# EAGLE board Kruispunt schema v3 (EAGLE 9.1.2)
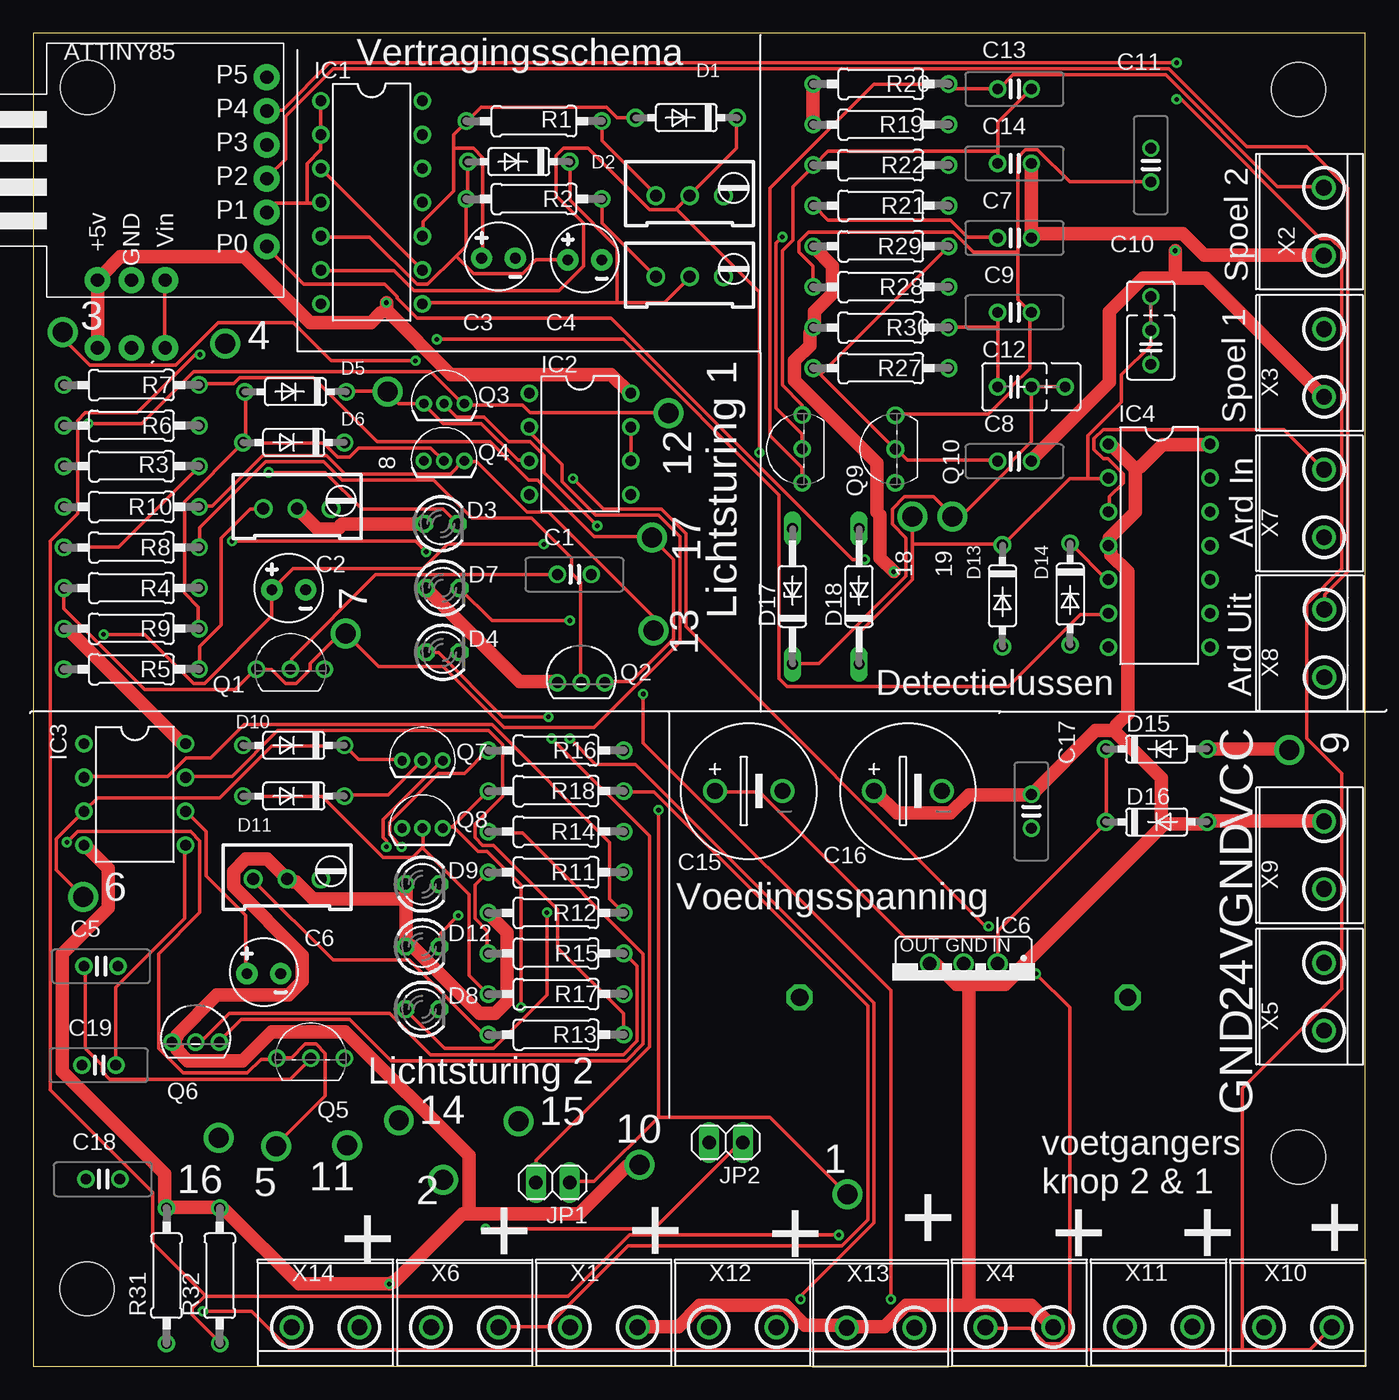
[diagram p0: board, top side]
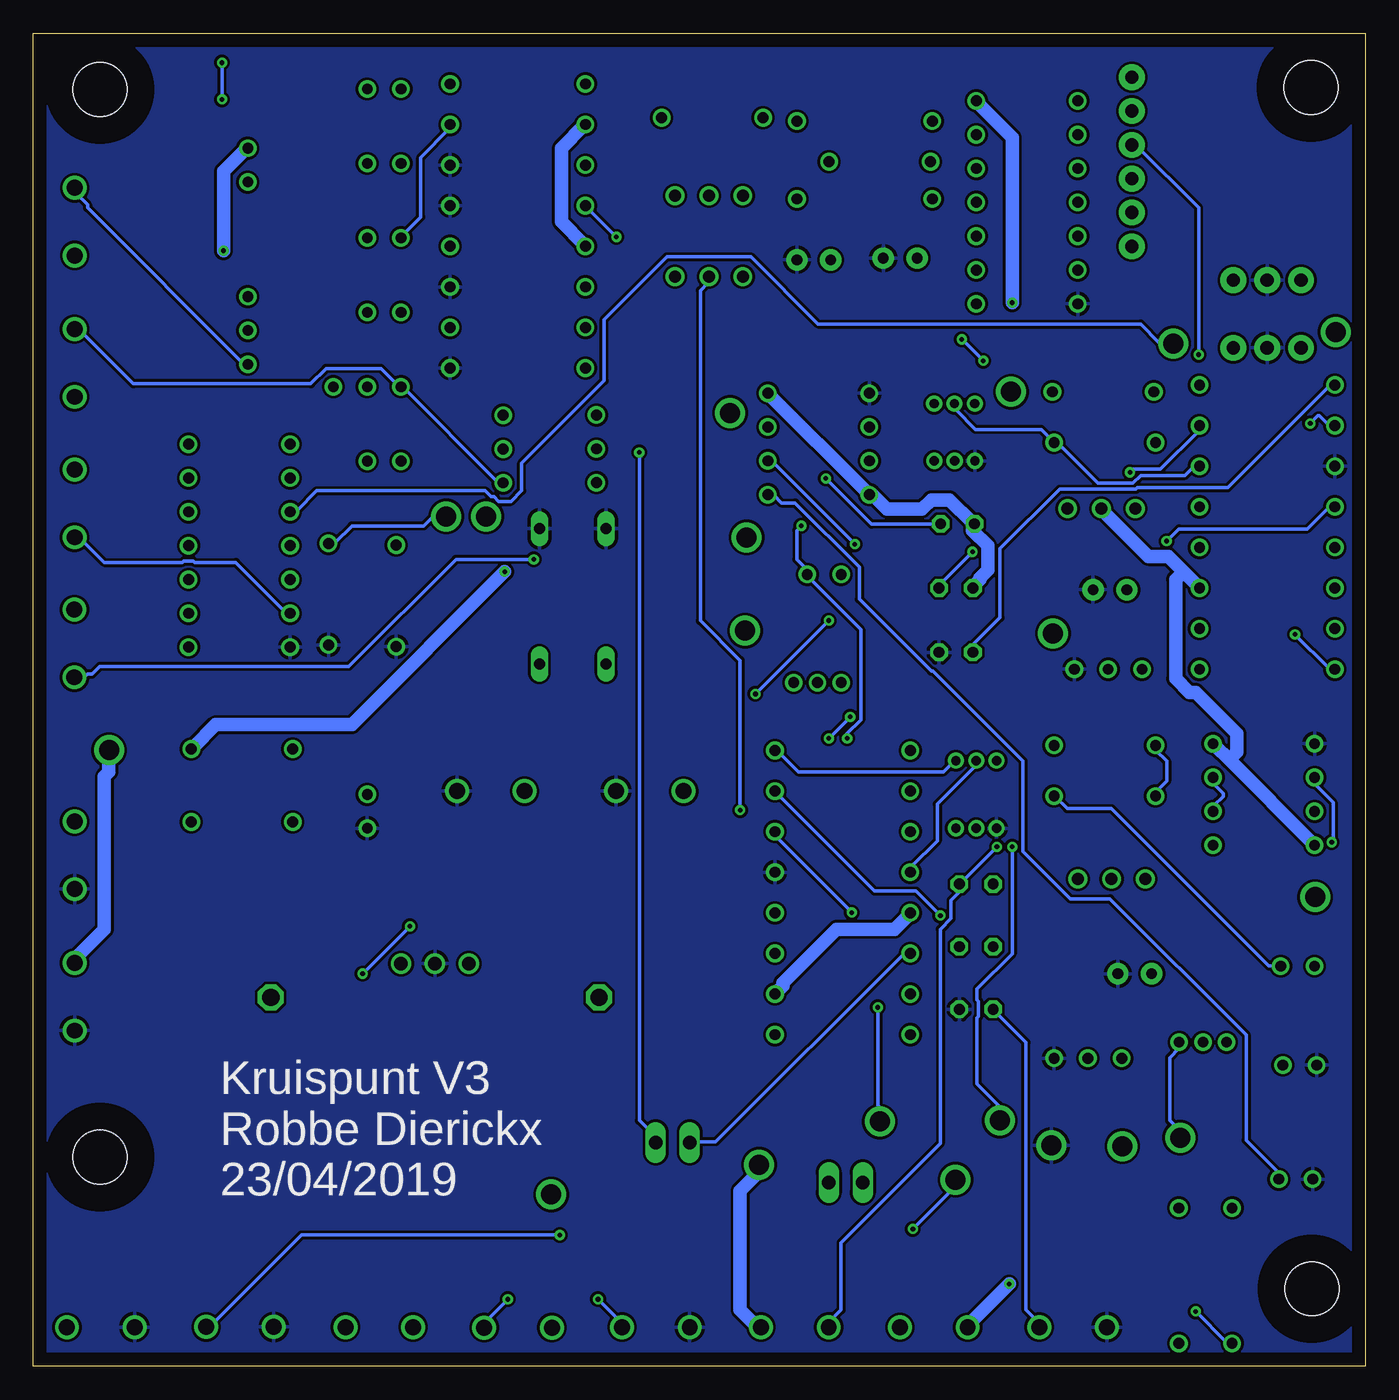
[diagram p1: board, bottom side, seen from below]

Size 100 x 100.07 mm. Coordinates in mm from the lower left corner, seen from the top.
Outline: 0,0 100,0 100,100.07 0,100.07 0,0
Copper layers (1*16): Top 0.035mm / dielectric 1.5mm / Bottom 0.035mm
Design rules "default *": minimum track width 10mil, minimum drill 0.35mm, track to track 8mil, track to pad 8mil, pad to pad 8mil, via to via 8mil, smd to smd 6mil, copper to edge 40mil, drill to drill 8mil, minimum pad ring 10mil, minimum via ring 8mil, stop-mask expansion 4mil, vias tented up to drill 0mil, thermal gap 10mil
Net classes: 0 default: clearance 0.205 mm; 1 VCC: width 1.016 mm, clearance 0.205 mm to class 0, clearance 0.205 mm

## Footprints (pad centres in the part's own frame; a part is rotated, then mirrored left to right if it is on the bottom)
PAD = drill 1.5: P$1 0,0
DIGISPARK = drill 1 pad 1.93: 5V 17.78,3.81; 5V1 22.86,3.81; GND 17.78,6.35; GND1 22.86,6.35; P0 15.24,16.51; P1 12.7,16.51; P2 10.16,16.51; P3 7.62,16.51; P4 5.08,16.51; P5 2.54,16.51; VIN 17.78,8.89; VIN1 22.86,8.89
CERAMIC-CAP-C050-025X075 = drill 0.8: P$1 -1.27,0; P$2 1.27,0
ELCO-2.5MMLEAD = drill 0.8 pad 1.6: + -1.27,0; - 1.27,0
CERAMIC-CAP-C025_050-035X075 = drill 0.8: P$1 -1.27,0; P$2 1.27,0; P$3 3.81,0
ELCO-5,0MMLEAD = drill 1.2: + -2.54,0; - 2.54,0
DO35-7 = drill 0.813: A 3.81,0; C -3.81,0
LED3MM = drill 0.813 octagon: A -1.27,0; K 1.27,0
DO35Z10 = drill 0.813 long: A 5.08,0; C -5.08,0
4,0 = hole 4.064: 0,0
DIL14 = drill 0.813: 1 -7.62,-3.81; 2 -5.08,-3.81; 3 -2.54,-3.81; 4 0,-3.81; 5 2.54,-3.81; 6 5.08,-3.81; 7 7.62,-3.81; 8 7.62,3.81; 9 5.08,3.81; 10 2.54,3.81; 11 0,3.81; 12 -2.54,3.81; 13 -5.08,3.81; 14 -7.62,3.81
DIL08 = drill 0.813: 1 -3.81,-3.81; 2 -1.27,-3.81; 3 1.27,-3.81; 4 3.81,-3.81; 5 3.81,3.81; 6 1.27,3.81; 7 -1.27,3.81; 8 -3.81,3.81
LM78XX-HEATSINK = drill 1.016: GND 0,-2.54; IN -2.54,-2.54; OUT 2.54,-2.54 | drill 1.3 octagon: P$1 -12.319,0; P$2 12.319,0
1X02 = drill 1.016 long: 1 -1.27,0; 2 1.27,0
TO92-CBE = drill 0.813: B 0,-1.27; C -2.54,-1.27; E 2.54,-1.27
TO92-EBC = drill 0.8: B 0,-0.127; C 1.778,-0.127; E -1.778,-0.127
TO-92 = drill 0.7: 1 -1.524,0; 2 0,0; 3 1.524,0
0207/10 = drill 0.813: 1 -5.08,0; 2 5.08,0
RTRIM64W = drill 0.9: 1 1.27,-2.54; 2 1.27,0; 3 1.27,2.54
W237-132 = drill 1.194: 1 -2.54,-0.635; 2 2.54,-0.635

## Placement (x,y rotation side)
1  Meetpin  [PAD]  61.12,12.89 0 top
2  Meetpin  [PAD]  30.76,14 0 top
3  Meetpin  [PAD]  2.22,77.64 0 top
4  Meetpin  [PAD]  14.41,76.78 0 top
5  Meetpin  [PAD]  18.24,16.52 0 top
6  Meetpin  [PAD]  3.76,35.22 0 top
7  Meetpin  [PAD]  23.44,55.01 0 top
8  Meetpin  [PAD]  26.61,73.16 0 top
9  Meetpin  [PAD]  94.31,46.25 0 top
10  Meetpin  [PAD]  45.51,15.12 0 top
11  Meetpin  [PAD]  23.57,16.56 0 top
12  [PAD]  47.69,71.56 0 top
13  [PAD]  46.56,55.22 0 top
14  Meetpin  [PAD]  27.44,18.45 0 top
15  Meetpin  [PAD]  36.44,18.37 0 top
16  Meetpin  [PAD]  13.91,17.15 0 top
17  Meetpin  [PAD]  46.44,62.21 0 top
18  [PAD]  66,63.8 270 top
19  [PAD]  69,63.8 270 top
ATTINY85  DIGISPARK  [DIGISPARK]  1.02,99.31 270 top
C1  100nF  [CERAMIC-CAP-C050-025X075]  40.62,59.44 0 top
C2  22µF  [ELCO-2.5MMLEAD]  19.18,58.29 0 top
C3  100µF  [ELCO-2.5MMLEAD]  34.92,83.19 0 top
C4  100µF  [ELCO-2.5MMLEAD]  41.4,83.06 0 top
C5  100nF  [CERAMIC-CAP-C050-025X075]  5.08,30.04 0 top
C6  22µF  [ELCO-2.5MMLEAD]  17.3,29.46 0 top
C7  10nF  [CERAMIC-CAP-C050-025X075]  73.66,84.71 0 top
C8  10nF  [CERAMIC-CAP-C050-025X075]  73.66,67.94 0 top
C9  10nF  [CERAMIC-CAP-C050-025X075]  73.66,79.12 0 top
C10  220nF  [CERAMIC-CAP-C025_050-035X075]  83.9,76.49 90 top
C11  10nF  [CERAMIC-CAP-C050-025X075]  83.9,90.17 90 top
C12  220nF  [CERAMIC-CAP-C025_050-035X075]  73.66,73.53 0 top
C13  10nF  [CERAMIC-CAP-C050-025X075]  73.66,95.88 0 top
C14  10nF  [CERAMIC-CAP-C050-025X075]  73.66,90.3 0 top
C15  470µF  [ELCO-5,0MMLEAD]  53.72,43.18 0 top
C16  470µF  [ELCO-5,0MMLEAD]  65.66,43.18 0 top
C17  100nF  [CERAMIC-CAP-C050-025X075]  74.93,41.66 90 top
C18  10nF  [CERAMIC-CAP-C050-025X075]  5.22,14.04 0 top
C19  10nF  [CERAMIC-CAP-C050-025X075]  4.92,22.6 0 top
D1  1N4148  [DO35-7]  49.02,93.73 180 top
D2  1N4148  [DO35-7]  36.45,90.42 180 top
D3  Rood  [LED3MM]  30.61,63.25 0 top
D4  Groen  [LED3MM]  30.73,53.59 0 top
D5  1N4148  [DO35-7]  19.68,73.15 180 top
D6  1N4148  [DO35-7]  19.56,69.34 180 top
D7  Geel  [LED3MM]  30.73,58.42 0 top
D8  Groen  [LED3MM]  29.21,26.8 0 top
D9  Rood  [LED3MM]  29.21,36.2 0 top
D10  1N4148  [DO35-7]  19.56,46.61 180 top
D11  1N4148  [DO35-7]  19.56,42.8 180 top
D12  Geel  [LED3MM]  29.21,31.5 0 top
D13  1N4148  [DO35-7]  72.76,57.83 270 top
D14  1N4148  [DO35-7]  77.84,57.96 270 top
D15  1N4004  [DO35-7]  84.33,46.34 0 top
D16  1N4004  [DO35-7]  84.33,40.86 0 top
D17  1N821  [DO35Z10]  57,57.8 90 top
D18  1N821  [DO35Z10]  62,57.8 90 top
HOLE1  MOUNT-HOLE-4MM  [4,0]  94.99,15.7 0 top
HOLE2  MOUNT-HOLE-4MM  [4,0]  94.99,95.85 0 top
HOLE3  MOUNT-HOLE-4MM  [4,0]  4.08,96 0 top
HOLE4  MOUNT-HOLE-4MM  [4,0]  4.02,5.81 0 top
IC1  74ACT132N  [DIL14]  25.4,87.38 270 top
IC2  LM555N  [DIL08]  41.04,69.24 270 top
IC3  LM555N  [DIL08]  7.62,42.93 270 top
IC4  74AC132N  [DIL14]  84.53,61.6 270 top
IC6  [LM78XX-HEATSINK]  69.85,27.69 180 top
JP1  [1X02]  39,13.8 180 top
JP2  [1X02]  52,16.8 180 top
Q1  BC548  [TO92-CBE]  19.3,53.59 0 top
Q2  2N3906  [TO92-EBC]  41.13,51.45 0 top
Q3  [TO-92]  30.84,72.26 0 top
Q4  [TO-92]  30.83,67.97 0 top
Q5  BC548  [TO92-CBE]  20.83,24.38 0 top
Q6  2N3906  [TO92-EBC]  12.19,24.45 0 top
Q7  [TO-92]  29.21,45.47 0 top
Q8  [TO-92]  29.21,40.39 0 top
Q9  BC548  [TO92-CBE]  56.45,68.87 90 top
Q10  BC548  [TO92-CBE]  63.45,68.85 90 top
R1  8k  [0207/10]  37.59,93.47 0 top
R2  8k  [0207/10]  37.59,87.63 0 top
R3  1k  [0207/10]  7.37,67.56 0 top
R4  10k  [0207/10]  7.37,58.42 0 top
R5  80k  [0207/10]  7.37,52.32 0 top
R6  1k  [0207/10]  7.37,70.61 0 top
R7  1k  [0207/10]  7.37,73.66 0 top
R8  10k  [0207/10]  7.37,61.47 0 top
R9  10k  [0207/10]  7.37,55.37 0 top
R10  220  [0207/10]  7.37,64.52 0 top
R11  1k  [0207/10]  39.24,37.08 0 top
R12  10k  [0207/10]  39.24,34.04 0 top
R13  80k  [0207/10]  39.24,24.89 0 top
R14  1k  [0207/10]  39.24,40.13 0 top
R15  10k  [0207/10]  39.24,30.99 0 top
R16  1k  [0207/10]  39.24,46.23 0 top
R17  10k  [0207/10]  39.24,27.94 0 top
R18  220  [0207/10]  39.24,43.18 0 top
R19  47k  [0207/10]  63.63,93.22 0 top
R20  2,2k  [0207/10]  63.63,96.27 0 top
R21  10k  [0207/10]  63.63,87.12 0 top
R22  470  [0207/10]  63.63,90.17 0 top
R23  5k  [RTRIM64W]  49.28,83.06 270 top
R24  5k  [RTRIM64W]  49.28,89.15 270 top
R25  50k  [RTRIM64W]  19.81,65.66 270 top
R26  50k  [RTRIM64W]  19.05,37.85 270 top
R27  10k  [0207/10]  63.63,74.93 0 top
R28  470  [0207/10]  63.63,81.03 0 top
R29  47k  [0207/10]  63.63,84.07 0 top
R30  2,2k  [0207/10]  63.63,77.98 0 top
R31  10k  [0207/10]  10,6.8 90 top
R32  10k  [0207/10]  14,6.8 90 top
X1  Rood2  [W237-132]  42.83,3.57 0 top
X2  [W237-132]  96.25,85.92 90 top
X3  [W237-132]  96.27,75.31 90 top
X4  Rood1  [W237-132]  74.03,3.57 0 top
X5  [W237-132]  96.27,27.73 90 top
X6  Geel2  [W237-132]  32.39,3.56 0 top
X7  [W237-132]  96.27,64.77 90 top
X8  [W237-132]  96.28,54.26 90 top
X9  [W237-132]  96.27,38.36 90 top
X10  Voetgagnersknop1  [W237-132]  94.94,3.56 0 top
X11  Voetgangersknop 2 en 1  [W237-132]  84.49,3.59 0 top
X12  Groen1  [W237-132]  53.26,3.57 0 top
X13  Geel1  [W237-132]  63.61,3.53 0 top
X14  Groen2  [W237-132]  21.94,3.56 0 top

## Library data of the parts
1-19 ATTINY85 C2-C4 C6 C10 C12 C15 C16 D1 D2 D5 D6 D10 D11 D13-D18 HOLE1-HOLE4 IC1-IC4 IC6 JP1 JP2 Q1-Q10 R1-R32 = Kruispunt Library
C1 C5 C7-C9 C11 C13 C14 C17-C19 = test(3)
D3 D4 D7-D9 D12 = Hardware lichtsturing library; MF: VISHAY SEMICONDUCTOR; OC_FARNELL: 1612439
X1-X14 = Kruispunt Library; OC_FARNELL: unknown; OC_NEWARK: unknown

## Nets
DIG-IN1: C1.P$2 D6.C JP1.2 Q3.2 R3.2 R8.1
DIG-IN2: C5.P$2 D11.C JP2.2 Q7.2 R11.1 R15.1
GND [VCC]: 11.P$1 ATTINY85.GND ATTINY85.GND1 C2.- C3.- C4.- C6.- C15.- C16.- C17.P$1 C18.P$1 C19.P$1 D4.K D8.K D13.A D14.A D17.A D18.A IC1.7 IC2.1 IC3.1 IC4.7 IC6.GND Q1.E Q4.1 Q5.E Q8.1 R3.1 R11.2 R21.2 R22.2 R27.2 R28.2 X5.1 X9.1 X10.1 X11.1 X12.1 X14.1
LUS-OUT1: C9.P$1 C12.P$1 Q10.C R30.2 X3.2
N48 [VCC]: C8.P$2 C11.P$2 X3.1
N49 [VCC]: C7.P$2 C14.P$2 X2.1
N$1: C4.+ D2.A IC1.5 R2.1
N$2: IC1.3 IC1.9
N$3: ATTINY85.P1 IC1.1 IC1.2 IC1.4
N$4: C1.P$1 Q1.B
N$5: R13.1 R26.1
N$6: 1.P$1 D2.C IC1.8 JP1.1 R23.2
N$7: C3.+ D1.A IC1.10 R1.1
N$8: 7.P$1 IC2.2 Q1.C R4.1
N$9: C2.+ IC2.6 IC2.7 R5.1
N$10: 17.P$1 Q2.C R7.2
N$11: D4.A R7.1 X12.2
N$12: Q2.B R8.2
N$13: 12.P$1 Q3.3 R6.1
N$14: D3.K R6.2 X4.1
N$15: 8.P$1 D5.C IC2.3 Q3.1
N$16: R2.2 R23.1
N$17: 13.P$1 Q4.3 R10.2
N$18: D7.K R10.1 X13.2
N$19: C5.P$1 Q5.B
N$20: 5.P$1 IC3.2 Q5.C R12.2
N$21: C6.+ IC3.6 IC3.7 R13.2
N$22: 16.P$1 Q6.C R14.1
N$23: D8.A R14.2 X14.2
N$24: Q6.B R15.2
N$25: 14.P$1 Q7.3 R16.2
N$26: ATTINY85.P3 R32.1 X11.2
N$27: 6.P$1 D10.C IC3.3 Q7.1
N$28: D10.A D11.A Q8.2 R17.1
N$29: 15.P$1 Q8.3 R18.1
N$30: D12.K R18.2 X6.2
N$31: C7.P$1 Q9.B R19.2 R21.1
N$32: C13.P$2 C14.P$1 Q9.E R22.1
N$33: C10.P$1 C13.P$1 Q9.C R20.2 X2.2
N$34: 18.P$1 C10.P$2 C10.P$3 D13.C D18.C IC4.2
N$35: 4.P$1 IC4.3 X7.2
N$36: R1.2 R24.1
N$37: R5.2 R25.1
N$38: C19.P$2 IC3.5
N$39: C8.P$1 Q10.B R27.1 R29.2
N$40: C9.P$2 C11.P$1 Q10.E R28.1
N$41: D5.A D6.A Q4.2 R9.2
N$42: 19.P$1 C12.P$2 C12.P$3 D14.C D17.C IC4.5
N$43: C18.P$2 IC2.5
N$44: 3.P$1 IC4.6 X7.1
N$45: C15.+ D15.C D16.C IC6.IN
N$47: 2.P$1 D1.C IC1.6 JP2.1 R24.2
N$48: ATTINY85.P2 X8.2
N$49: D9.K R16.1 X1.1
N$50: ATTINY85.P0 X8.1
N$51: ATTINY85.P4 R31.1 X10.2
VCC [VCC]: 10.P$1 ATTINY85.5V ATTINY85.5V1 C16.+ C17.P$2 D3.A D7.A D9.A D12.A D16.A IC1.14 IC2.4 IC2.8 IC3.4 IC3.8 IC4.1 IC4.4 IC4.14 IC6.OUT Q2.E Q6.E R4.2 R9.1 R12.1 R17.2 R25.2 R26.2 R31.2 R32.2 X1.2 X4.2 X6.1 X9.2 X13.1
VCC-LUS [VCC]: 9.P$1 D15.A R19.1 R20.1 R29.1 R30.1 X5.2
VIN: ATTINY85.VIN ATTINY85.VIN1

## Tracks (layer width: path | path; a pad name or v marks a point on that pad's centre or on a via)
DIG-IN1  (via drill 0.35)
  Top 0.254: R8.1 2.29,61.48 6.43,61.48 12.39,67.45 R3.2 | v42.34,63.09 38.33,67.11 38.33,68.37 37.29,69.4 35.69,69.4 33.85,71.24 31.79,71.24 30.87,72.16 Q3.2 | v38.9,47.14 46.24,39.8 46.24,23.96 37.75,15.47 37.75,13.86 JP1.2
  Bottom 0.254: Q3.2 30.75,72.16 30.75,71.81 29.26,70.32 24.33,70.32 23.41,69.4 D6.C 23.29,69.29 23.07,69.29 20.08,66.3 17.44,66.3 16.87,66.88 13.54,66.88 12.97,67.45 12.51,67.45 R3.2 | v42.34,63.09 42.69,62.74 42.69,60.56 42,59.88 42,59.53 C1.P$2 42,59.42 37.87,55.29 37.87,48.52 38.9,47.48 v38.9,47.14
DIG-IN2
  Top 0.254: R15.1 34.08,31.07 34.08,32.68 33.16,33.6 33.16,36.12 34.08,37.04 R11.1 | Q7.2 29.15,45.42 26.62,42.89 23.41,42.89 D11.C
  Bottom 0.254: JP2.2 50.72,16.84 48.77,16.84 34.65,30.96 34.2,30.96 R15.1 | C5.P$2 6.43,30.04 7.23,30.04 19.05,41.86 22.38,41.86 23.29,42.78 D11.C | R11.1 34.08,37.16 34.08,37.5 32.13,39.45 32.13,42.2 29.26,45.07 29.26,45.42 Q7.2
GND
  pour Bottom: 0,100.8 100,100.8 100,-0.2 0,-0.2
LUS-OUT1
  Top 0.254: 72.41,78.01 72.41,79.04 C9.P$1 | 72.41,78.01 72.41,73.65 C12.P$1 | 72.41,78.01 68.73,78.01 R30.2
  Bottom 0.254: Q10.C 64.83,66.42 65.18,66.42 72.29,73.53 C12.P$1 72.41,73.42 73.9,74.91 78.03,74.91 79.18,73.76 92.49,73.76 96.5,77.78 96.85,77.78 X3.2
N48  (via drill 0.35)
  Top 1.016: 85.72,81.68 88.01,81.68 96.85,72.84 X3.1 | 85.72,81.68 83.31,81.68 80.78,79.15 80.78,73.88 74.93,68.02 C8.P$2 | 85.72,81.68 v85.72,83.74
  Bottom 1.016: v85.72,83.74 85.72,89.71 84,91.43 C11.P$2
N49
  Top 1.016: C14.P$2 74.93,84.78 C7.P$2 75.39,85.01 86.29,85.01 87.9,83.4 96.85,83.4 X2.1
N$1
  Top 0.254: 31.73,83.34 32.47,84.09 32.47,87.53 R2.1 32.59,87.65 32.59,90.4 D2.A | 31.73,83.34 29.61,81.22 28.8,81.22 25.25,84.78 21.69,84.78 IC1.5 | 31.73,83.34 33.05,82.02 36.72,82.02 37.75,83.06 40.05,83.06 C4.+
N$2
  Top 0.254: IC1.3 21.69,89.83 29.15,82.37 IC1.9
N$3
  Top 0.254: IC1.1 21.57,94.99 21.57,92.47 IC1.2 21.57,92.35 21.57,91.32 20.54,90.28 20.54,87.3 | 20.54,87.3 18.13,87.3 17.56,86.73 ATTINY85.P1 | 20.54,87.3 21.57,87.3 IC1.4
N$4
  Top 0.254: C1.P$1 39.24,59.42 25.7,59.42 19.39,53.11 19.39,52.42 Q1.B
N$5
  Top 0.254: R13.1 34.08,24.99 33.74,24.99 28.23,30.5 22.49,30.5 16.52,36.47 R26.1
N$6  (via drill 0.35)
  Top 0.254: 46.93,18.68 42.11,13.86 40.28,13.86 JP1.1 | 46.93,18.68 55.31,18.68 61.05,12.94 1.P$1 | 43.83,79.84 47.39,79.84 49.23,81.68 R23.2 | 43.83,79.84 29.26,79.84 IC1.8 | 43.83,79.84 43.83,83.97 40.28,87.53 40.28,90.4 D2.C | v46.93,41.75 46.93,18.68
  Bottom 0.254: v46.93,41.75 46.93,52.99 49.92,55.98 49.92,80.76 49.34,81.34 49.34,81.68 R23.2
N$7
  Top 0.254: 31.56,91.43 31.56,92.47 32.47,93.38 R1.1 32.59,93.5 33.62,94.53 43.03,94.53 43.83,93.73 D1.A | 31.56,91.43 31.56,88.22 29.26,85.93 29.26,84.89 IC1.10 | 31.56,91.43 33.05,91.43 33.74,90.74 33.74,83.29 C3.+
N$8
  Top 0.254: R4.1 2.29,58.38 2.29,56.89 8.38,50.81 15.15,50.81 16.64,52.3 Q1.C 16.87,52.3 17.9,52.3 18.93,51.27 19.74,51.27 20.77,52.3 20.77,52.76 22.95,54.94 23.41,54.94 7.P$1 23.52,54.94 25.93,52.53 30.75,52.53 35.34,47.94 42.11,47.94 48.54,54.37 48.54,62.29 46.93,63.89 42.23,63.89 39.7,66.42 39.7,67.68 37.29,70.09 37.29,70.43 IC2.2
N$9  (via drill 0.35)
  Top 0.254: IC2.6 44.87,68.02 44.87,70.43 IC2.7 | v5.28,54.94 8.38,54.94 12.05,51.27 12.85,51.27 17.9,56.32 17.9,58.27 C2.+ 18.02,58.38 19.51,59.88 29.26,59.88 31.1,61.71 v38.33,61.71
  Bottom 0.254: v5.28,54.94 2.75,52.42 2.29,52.42 R5.1 | v38.33,61.71 44.52,67.91 44.75,67.91 IC2.6
N$10
  Top 0.254: Q2.C 42.92,51.38 44.87,51.38 48.08,54.6 48.08,60.56 46.47,62.17 17.P$1 46.36,62.29 42.11,62.29 37.87,66.53 37.18,66.53 34.31,69.4 25.82,69.4 21,74.22 15.49,74.22 15.03,73.76 12.51,73.76 R7.2
N$11  (via drill 0.35)
  Top 0.254: v57.6,5.03 57.6,5.26 63.11,10.76 63.11,27.29 45.21,45.19 42.23,45.19 v40.28,47.14 | v38.67,48.75 35.23,48.75 30.41,53.56 29.49,53.56 D4.A
  Bottom 0.254: R7.1 2.64,73.65 10.33,65.96 17.1,65.96 17.21,65.84 22.95,65.84 27.43,61.37 27.43,56.2 29.49,54.14 29.49,53.68 D4.A | v57.6,5.03 55.88,3.3 55.88,2.96 X12.2 | v38.67,48.75 v40.28,47.14
N$12
  Top 0.254: Q2.B 41.08,51.38 41.08,58.84 40.39,59.53 40.39,60.68 37.41,63.66 32.93,63.66 30.06,66.53 23.18,66.53 21.8,67.91 17.44,67.91 12.51,62.98 12.51,61.48 R8.2
N$13  (via drill 0.35)
  Top 0.254: 12.P$1 47.62,71.58 37.29,71.58 36.72,72.16 32.47,72.16 Q3.3 32.24,72.27 29.84,74.68 12.05,74.68 8.15,70.78 v4.13,70.78
  Bottom 0.254: v4.13,70.78 3.56,71.35 3.44,71.35 2.75,70.66 2.29,70.66 R6.1
N$14  (via drill 0.35)
  Top 0.254: v17.67,67.11 21.92,67.11 24.67,64.35 30.75,64.35 31.79,63.32 D3.K | v75.28,29.47 77.8,26.94 77.8,2.39 77.11,1.7 75.97,1.7 74.82,2.85 71.49,2.85 X4.1 | v71.72,33.02 71.49,33.02 49,55.52 49,62.52 47.16,64.35 42.8,64.35 v40.51,66.65
  Bottom 0.254: v17.67,67.11 17.44,67.34 15.38,67.34 12.51,70.2 12.51,70.55 R6.2 | v71.72,33.02 v75.28,29.47 | v40.51,66.65 37.06,63.2 31.9,63.2 D3.K
N$15
  Top 0.254: IC2.3 37.18,68.02 36.38,68.02 33.62,70.78 30.75,70.78 29.38,72.16 Q3.1 29.26,72.27 27.43,72.27 26.62,73.07 8.P$1 26.51,73.19 23.52,73.19 D5.C
N$16
  Top 0.254: R2.2 42.69,87.53 42.69,85.81 46.7,81.79 R23.1
N$17
  Top 0.254: 13.P$1 46.47,55.29 46.47,56.32 38.67,64.12 37.06,64.12 33.28,67.91 32.36,67.91 Q4.3 32.24,67.91 31.33,66.99 23.41,66.99 22.03,68.37 17.21,68.37 13.43,64.58 12.51,64.58 R10.2
N$18  (via drill 0.35)
  Top 0.254: v14.92,61.94 28.69,61.94 v29.49,61.14 | v64.38,5.03 64.38,28.2 45.78,46.8 v45.78,50.47 | v40.28,55.98 34.42,55.98 32.02,58.38 D7.K
  Bottom 0.254: v14.92,61.94 14,62.86 4.36,62.86 2.75,64.47 2.29,64.47 R10.1 | v29.49,61.14 31.9,58.73 31.9,58.5 D7.K | v64.38,5.03 66.1,3.3 66.1,2.96 X13.2 | v40.28,55.98 v45.78,50.47
N$19
  Top 0.254: C5.P$1 3.9,29.93 3.9,23.84 5.16,22.58 5.16,22.12 5.74,21.55 19.28,21.55 20.77,23.04 Q5.B
N$20  (via drill 0.35)
  Top 0.254: 5.P$1 18.25,16.62 21.92,20.29 21.92,23.5 21.23,24.19 20.43,24.19 19.39,23.16 18.36,23.16 Q5.C 18.25,23.04 17.1,23.04 16.07,22.01 11.24,22.01 9.41,23.84 9.41,30.96 12.51,34.06 12.51,39.45 11.82,40.14 3.33,40.14 v2.52,39.34 | IC3.2 3.9,44.27 10.1,44.27 11.47,45.65 13.31,45.65 15.84,48.17 34.42,48.17 43.26,39.34 43.26,35.09 44.29,34.06 R12.2
  Bottom 0.254: v2.52,39.34 2.41,39.45 2.41,42.32 3.79,43.7 3.79,44.16 IC3.2
N$21
  Top 0.254: R13.2 44.29,24.99 44.29,26.48 39.36,31.42 39.36,34.29 34.54,39.11 33.74,39.11 33.16,39.68 33.16,40.71 35.23,42.78 35.23,46.68 34.2,47.71 18.36,47.71 14.92,44.27 11.47,44.27 IC3.7 | C6.+ 15.95,29.47 15.95,33.83 12.97,36.81 12.97,40.14 11.47,41.63 IC3.6
  Bottom 0.254: IC3.6 11.36,41.75 11.36,42.09 10.67,42.78 10.67,43.01 11.36,43.7 11.36,44.16 IC3.7
N$22
  Top 0.254: R14.1 34.2,40.02 36.72,40.02 45.78,30.96 45.78,24.19 44.52,22.93 26.85,22.93 23.75,26.02 15.61,26.02 14,24.42 Q6.C
  Bottom 0.254: Q6.C 14,24.3 14,23.84 14.69,23.16 14.69,18.45 14,17.76 14,17.19 16.P$1
N$23  (via drill 0.35)
  Top 0.254: v38.56,34.06 38.56,27.86 34.54,23.84 30.87,23.84 28,26.71 D8.A
  Bottom 0.254: D8.A 27.88,26.71 25.47,24.3 25.47,4.22 24.56,3.3 24.56,2.96 X14.2 | v38.56,34.06 44.29,39.8 44.29,40.02 R14.2
N$24
  Top 0.254: Q6.B 12.28,24.42 12.62,24.42 14.69,26.48 26.74,26.48 29.84,23.39 44.29,23.39 45.33,24.42 45.33,30.04 44.41,30.96 R15.2
N$25  (via drill 0.35)
  Top 0.254: v26.51,38.99 26.51,39.45 26.28,39.68 26.28,41.06 30.64,45.42 Q7.3
  Bottom 0.254: Q7.3 30.75,45.42 30.98,45.19 31.1,45.19 31.67,44.61 42.57,44.61 44.29,46.34 R16.2 | v26.51,38.99 26.51,30.96 29.15,28.32 29.15,27.52 29.03,27.4 29.03,26.25 29.15,26.14 29.15,21.21 27.54,19.6 27.54,18.57 14.P$1
N$26  (via drill 0.35)
  Top 0.254: 12.85,5.26 11.93,4.34 11.93,3.88 14,1.81 R32.1 | 12.85,5.26 40.16,5.26 44.75,9.85 v60.47,9.85 | v12.51,75.94 12.16,75.94 7.8,71.58 3.9,71.58 3.33,71.01 3.33,64.01 1.26,61.94 1.26,20.75 8.95,13.06 8.95,9.27 12.85,5.37 12.85,5.26
  Bottom 0.254: v60.47,9.85 79.87,9.85 86.75,2.96 86.98,2.96 X11.2 | v12.51,75.94 12.51,86.96 17.21,91.66 17.44,91.66 ATTINY85.P3
N$27
  Top 0.254: Q7.1 27.66,45.53 24.44,45.53 23.41,46.57 D10.C 23.29,46.57 17.9,46.57 14,42.66 4.82,42.66 3.9,41.75 IC3.3 3.79,41.63 1.72,39.57 1.72,37.27 3.67,35.32 6.P$1
N$28
  Top 0.254: 29.26,38.88 29.26,40.37 Q8.2 | 29.26,38.88 32.7,35.44 32.7,29.35 34.08,27.98 R17.1 | D11.A 15.84,42.78 21.69,42.78 26.28,38.19 28.46,38.19 29.15,38.88 29.26,38.88
  Bottom 0.254: D11.A 15.72,42.89 15.72,43.12 14.92,43.93 14.92,45.42 15.72,46.22 15.72,46.57 D10.A
N$29  (via drill 0.35)
  Top 0.254: 31.44,40.48 30.75,40.48 Q8.3 | 31.44,40.48 34.08,43.12 R18.1 | v36.6,26.94 36.6,36.12 34.08,38.65 33.39,38.65 31.56,40.48 31.44,40.48
  Bottom 0.254: v36.6,26.94 36.6,19.6 36.49,19.48 36.49,18.45 15.P$1
N$30  (via drill 0.35)
  Top 0.254: v31.9,33.83 30.52,32.45 30.52,31.53 D12.K | X6.2 35,2.96 38.56,2.96 44.64,9.04 60.7,9.04 62.65,10.99 62.65,27.06 46.59,43.12 44.41,43.12 R18.2
  Bottom 0.254: v31.9,33.83 33.74,35.66 36.84,35.66 44.29,43.12 R18.2
N$31  (via drill 0.35)
  Top 0.254: C7.P$1 72.29,84.78 70.11,84.78 68.85,86.04 59.67,86.04 58.64,87.07 R21.1 | v56.23,84.78 55.77,84.32 55.77,71.92 57.72,69.97 57.72,68.94 Q9.B
  Bottom 0.254: v56.23,84.78 58.52,87.07 R21.1 | R19.2 68.73,93.15 68.73,92.93 70.92,90.74 70.92,86.27 72.41,84.78 C7.P$1
N$32
  Top 0.254: 72.41,91.2 72.41,93.38 74.82,95.79 C13.P$2 | 72.41,91.2 72.41,90.4 C14.P$1 | Q9.E 57.72,71.47 57.72,72.16 56.23,73.65 56.23,83.74 57.03,84.55 57.03,88.56 58.52,90.06 R22.1 58.64,90.17 59.67,91.2 72.41,91.2
N$33
  Top 0.254: Q9.C 57.72,66.42 57.72,67.45 55.31,69.86 55.31,88.45 63.11,96.25 68.62,96.25 R20.2 68.73,96.25 69.08,95.91 72.29,95.91 C13.P$1 72.52,95.91 73.56,96.94 85.03,96.94 93.41,88.56 96.85,88.56 X2.2
  Bottom 0.254: C10.P$1 84,75.25 84.23,75.25 95.93,86.96 95.93,87.19 96.85,88.1 96.85,88.45 X2.2
N$34
  Top 0.254: C10.P$3 83.88,80.19 83.88,77.78 C10.P$2 83.88,77.66 83.88,76.63 81.7,74.45 81.7,72.38 79.18,69.86 79.18,66.65 | 65.98,61.71 65.98,63.78 18.P$1 | 65.98,61.71 65.98,59.07 62.08,55.17 62.08,52.76 D18.C | 65.98,61.71 72.75,61.71 D13.C 72.87,61.71 77.8,66.65 79.18,66.65 | 79.18,66.65 80.67,66.65 IC4.2
N$35
  Top 0.254: IC4.3 80.78,64.24 80.78,65.27 81.82,66.3 81.82,66.99 80.67,68.14 80.33,68.14 79.64,68.83 79.64,69.63 80.33,70.32 93.86,70.32 96.85,67.34 X7.2
  Bottom 0.254: 4.P$1 14.46,76.86 15.49,76.86 16.87,78.24 41.08,78.24 46.13,83.29 52.44,83.29 57.15,78.58 57.15,73.99 63.34,67.79 63.34,65.73 64.14,64.93 65.06,64.93 65.41,65.27 65.64,65.27 66.1,65.73 78.72,65.73 80.21,64.24 80.67,64.24 IC4.3
N$36
  Top 0.254: R1.2 42.69,93.38 42.69,92.01 46.7,87.99 R24.1
N$37
  Top 0.254: R5.2 12.51,52.42 12.51,54.02 14.11,55.63 14.11,62.17 16.29,64.35 17.21,64.35 R25.1
N$38
  Top 0.254: C19.P$2 6.2,22.7 6.2,28.43 11.36,33.6 11.36,39.11 IC3.5
N$39
  Top 0.254: C8.P$1 72.29,68.02 65.64,68.02 64.83,68.83 Q10.B 64.72,68.83 59.1,74.45 | 59.1,74.45 58.64,74.91 R27.1 | 59.1,74.45 68.62,83.97 R29.2
N$40
  Top 0.254: Q10.E 64.83,71.47 71.72,71.47 73.44,73.19 73.44,73.53 74.82,74.91 74.82,79.04 C9.P$2 74.82,79.15 73.9,80.07 73.9,83.63 | 73.9,83.63 73.9,90.74 74.47,91.32 75.39,91.32 77.8,88.91 83.88,88.91 C11.P$1 | 73.9,83.63 70.57,83.63 69.08,85.12 58.18,85.12 57.49,84.43 57.49,83.63 58.52,82.6 58.52,81.1 R28.1
N$41
  Top 0.254: Q4.2 30.75,68.02 29.84,68.94 24.44,68.94 23.75,68.25 22.84,68.25 21.8,69.29 15.84,69.29 D6.A | R9.2 12.39,55.4 12.39,57.01 11.36,58.04 11.36,64.93 15.72,69.29 D6.A | D5.A 15.95,73.07 15.95,69.4 D6.A
N$42
  Top 0.254: D14.C 77.92,61.71 80.67,58.96 IC4.5 | C12.P$3 77.46,73.53 C12.P$2 74.93,73.42 74.93,69.4 73.44,67.91 73.44,67.56 69.77,63.89 69.08,63.89 19.P$1 68.97,63.89 67.59,65.27 65.41,65.27 64.49,64.35 64.49,63.2 65.52,62.17 65.52,59.3 58.98,52.76 57.03,52.76 D17.C
  Bottom 0.254: D14.C 77.8,61.83 77.34,61.83 76.08,63.09 70.69,63.09 70,63.78 69.08,63.78 19.P$1
N$43
  Bottom 0.254: C18.P$2 6.54,14.09 6.54,14.55 8.95,16.96 8.95,24.88 19.16,35.09 22.15,35.09 25.7,38.65 25.7,45.42 32.47,52.19 32.59,52.19 37.98,57.58 37.98,59.99 42.8,64.81 43.83,64.81 44.41,65.38 44.75,65.38 IC2.5
N$44  (via drill 0.35)
  Top 0.254: v28.69,75.48 22.38,75.48 19.51,78.35 13.88,78.35 10.67,75.14 4.25,75.14 2.29,77.09 2.29,77.55 3.P$1 | v30.29,77.09 44.29,77.09 56,65.38 56,51.62 56.57,51.04 73.21,51.04 78.6,56.43 80.67,56.43 IC4.6
  Bottom 0.254: IC4.6 80.78,56.55 81.01,56.55 84.8,60.34 87.9,60.34 88.01,60.45 88.7,60.45 88.82,60.34 94.67,60.34 96.5,62.17 96.85,62.17 X7.1 | v30.29,77.09 v28.69,75.48
N$45
  Top 0.254: D15.C 80.56,46.34 80.56,40.94 D16.C 80.56,40.83 72.41,32.68 72.41,32.22 | 72.41,32.22 72.41,30.27 IC6.IN | 72.41,32.22 65.41,32.22 54.51,43.12 51.29,43.12 C15.+
N$47  (via drill 0.35)
  Top 0.254: v33.97,10.3 46.59,10.3 53.01,16.73 53.24,16.73 JP2.1 | 48.2,86.84 46.24,86.84 41.65,91.43 39.82,91.43 39.24,90.86 39.24,87.88 41.31,85.81 41.31,82.6 39.47,80.76 28.57,80.76 27.08,82.25 21.69,82.25 IC1.6 | 48.2,86.84 49.23,87.88 R24.2 49.34,87.99 52.78,91.43 52.78,93.61 D1.C | v54.51,68.6 54.51,80.65 48.31,86.84 48.2,86.84
  Bottom 0.254: v33.97,10.3 30.87,13.4 30.87,13.98 2.P$1 | v54.51,68.6 54.51,18.45 53.36,17.3 53.36,16.84 JP2.1
N$48
  Top 0.254: X8.2 96.96,56.89 96.96,57.93 98.69,59.65 98.69,88.45 95.59,91.55 91.11,91.55 85.26,97.4 22.49,97.4 18.93,93.84 18.93,90.63 17.56,89.25 ATTINY85.P2
N$49  (via drill 0.35)
  Top 0.254: v27.66,38.99 26.74,39.91 26.74,40.83 30.41,44.5 32.36,44.5 34.08,46.22 R16.1
  Bottom 0.254: v27.66,38.99 30.41,36.24 D9.K 30.52,36.12 30.52,35.55 31.1,34.98 31.1,33.6 31.9,32.8 31.9,16.73 39.36,9.27 39.36,4.22 40.28,3.3 40.28,2.96 X1.1
N$50  (via drill 0.35)
  Top 0.254: v62.42,60.56 61.51,60.56 43.38,78.7 28.8,78.7 27.31,80.19 27.31,80.3 26.39,81.22 20.31,81.22 17.56,83.97 ATTINY85.P0
  Bottom 0.254: v62.42,60.56 68.28,60.56 76.31,52.53 95.01,52.53 95.59,51.96 95.93,51.96 96.16,51.73 96.85,51.73 X8.1
N$51  (via drill 0.35)
  Top 0.254: v12.74,4.11 16.41,4.11 19.28,1.24 90.77,1.24 | 90.77,1.24 95.82,1.24 97.42,2.85 X10.2 | v85.83,97.86 22.26,97.86 18.7,94.3 17.56,94.3 ATTINY85.P4 | v85.83,95.1 86.18,95.1 96.62,84.66 97.42,84.66 98.23,83.86 98.23,59.88 95.59,57.24 95.59,47.14 98.23,44.5 98.23,28.32 90.77,20.86 90.77,1.24
  Bottom 0.254: v12.74,4.11 10.44,1.81 10.1,1.81 R31.1 | v85.83,95.1 v85.83,97.86
VCC  (via drill 0.35)
  Top 1.016: 70.23,4.57 74.93,4.57 76.54,2.96 X4.2 | 70.23,4.57 65.52,4.57 63.92,2.96 61.16,2.96 X13.1 60.59,3.07 57.95,3.07 56.46,4.57 50.03,4.57 48.42,2.96 45.44,2.96 X1.2 | 82.73,67.34 82.73,64.12 80.78,62.17 80.78,61.71 IC4.4 80.9,61.14 80.9,60.91 82.16,59.65 82.16,48.97 81.36,48.17 81.13,47.71 | 82.73,67.34 80.78,69.29 IC4.1 | IC4.14 88.24,69.17 84.8,69.17 83.19,67.56 82.73,67.34 | C16.+ 63.23,43.12 64.83,41.52 68.85,41.52 70.23,42.89 74.82,42.89 C17.P$2 75.28,43.24 79.75,47.71 81.13,47.71 | X9.2 96.85,40.94 88.24,40.94 D16.A 87.67,40.71 84.92,40.71 | 70.23,28.66 72.98,28.66 74.24,29.93 74.24,30.04 84.92,40.71 | 70.23,28.66 69.31,28.66 67.82,30.16 67.36,30.16 IC6.OUT | 81.13,47.71 84.69,44.16 84.69,41.17 84.92,40.71 | 70.23,28.66 70.23,4.57 | 28,35.09 28,36.12 D9.A | 28,35.09 28,31.53 D12.A 28.46,31.53 33.51,26.48 34.65,26.48 35.57,27.4 35.57,32.57 34.2,33.94 R12.1 | 28,35.09 21,35.09 19.74,36.35 19.51,36.35 R26.2 17.56,38.07 15.95,38.07 15.03,37.16 15.03,36.01 20.2,30.84 20.2,28.89 19.16,27.86 13.77,27.86 10.79,24.88 10.79,24.76 10.44,24.42 Q6.E 10.79,23.96 10.79,23.73 11.59,22.93 15.72,22.93 17.9,25.11 23.41,25.11 32.7,15.81 32.7,11.45 | 32.7,11.45 32.24,11.45 27.2,6.4 v26.74,6.17 19.97,6.17 14.46,11.68 R32.2 14,11.91 10.1,11.91 R31.2 9.87,12.37 9.87,14.43 2.18,22.12 2.18,30.96 5.62,34.4 5.62,37.39 3.9,39.11 IC3.4 | 32.7,11.45 40.97,11.45 44.52,15.01 45.44,15.01 10.P$1 | R9.1 2.29,55.29 2.64,55.29 11.13,46.8 11.36,46.8 IC3.8 | Q2.E 39.24,51.38 36.49,51.38 29.49,58.38 D7.A | ATTINY85.5V1 4.82,76.52 4.82,81.45 ATTINY85.5V 5.16,81.91 6.54,83.29 15.84,83.29 20.77,78.35 25.36,78.35 26.05,79.04 26.51,79.27
  Top 1.016: D3.A 29.26,63.2 23.18,63.2 22.84,62.86 21.34,62.86 19.85,64.35 R25.2 | 26.51,79.27 v26.51,79.84 | 26.51,79.27 31.33,74.45 43.38,74.45 44.75,73.07 IC2.8
  Bottom 1.016: R17.2 44.29,27.98 43.72,28.55 43.72,28.78 39.7,32.8 35.34,32.8 34.31,33.83 34.31,34.06 34.2,34.06 R12.1 | v26.74,6.17 29.61,3.3 29.61,3.19 29.84,2.96 X6.1 | 10.21,45.53 11.24,46.57 11.47,46.57 11.47,46.68 IC3.8 | 10.21,45.53 3.9,39.22 IC3.4 | 13.65,59.65 14.8,60.79 16.29,60.79 19.85,64.35 R25.2 | 13.65,59.65 12.51,58.5 R4.2 | IC2.8 44.75,72.96 37.52,65.73 IC2.4 37.18,65.38 36.95,65.38 35.92,64.35 33.28,64.35 32.59,65.04 31.21,65.04 29.49,63.32 29.49,63.2 29.38,63.2 D3.A 29.49,62.74 28.34,61.6 28.34,59.76 28.92,59.19 28.92,59.07 29.38,58.61 29.38,58.5 D7.A | v26.51,79.84 26.51,92.24 29.15,94.88 29.15,94.99 IC1.14 | 10.21,45.53 9.64,46.11 9.64,47.48 12.74,50.58 13.2,50.58 14.23,51.62 14.23,59.07 13.65,59.65 | X1.2 45.44,2.96 45.67,2.96 46.93,4.22 46.93,13.17 45.56,14.55 45.56,15.01 10.P$1
VCC-LUS  (via drill 0.35)
  Top 1.016: R19.1 58.52,93.27 58.52,96.25 R20.1 | R29.1 58.64,83.97 60.01,82.6 60.01,80.53 58.64,79.15 58.64,78.01 R30.1 58.29,77.55 58.29,76.63 57.15,75.48 57.15,73.99 63.34,67.79 63.34,64.12 63.57,63.89 63.57,60.68 v64.6,59.65 | D15.A 88.24,46.34 94.21,46.34 9.P$1
  Bottom 1.016: R19.1 58.64,93.15 60.36,91.43 60.36,85.93 58.64,84.2 58.52,84.2 58.52,84.09 R29.1 | X5.2 96.85,30.39 96.85,30.62 94.67,32.8 94.67,44.27 94.33,44.61 94.33,45.42 94.44,45.53 94.44,46.11 94.33,46.22 9.P$1 | v64.6,59.65 76.08,48.17 86.29,48.17 88.01,46.45 88.01,46.34 88.13,46.34 D15.A
VIN
  Top 0.254: ATTINY85.VIN1 9.87,76.52 9.87,81.45 ATTINY85.VIN

## Text on the board
tPlace: Lichtsturing 1 | Detectielussen | VCC | Voedingsspanning | 24V | GND | Lichtsturing 2 | GND | voetgangers / knop 2 & 1 | + | + | + | + | + | + | + | +
bPlace: Kruispunt V3 / Robbe Dierickx / 23/04/2019
tNames: Vertragingsschema | Spoel 2 | Spoel 1 | Ard In | Ard Uit